# EAGLE board Mainland (EAGLE 9.2.0)
CNAME: MainlandBLE; CREVISION: RevB; DATECODE: Spooktober 2018
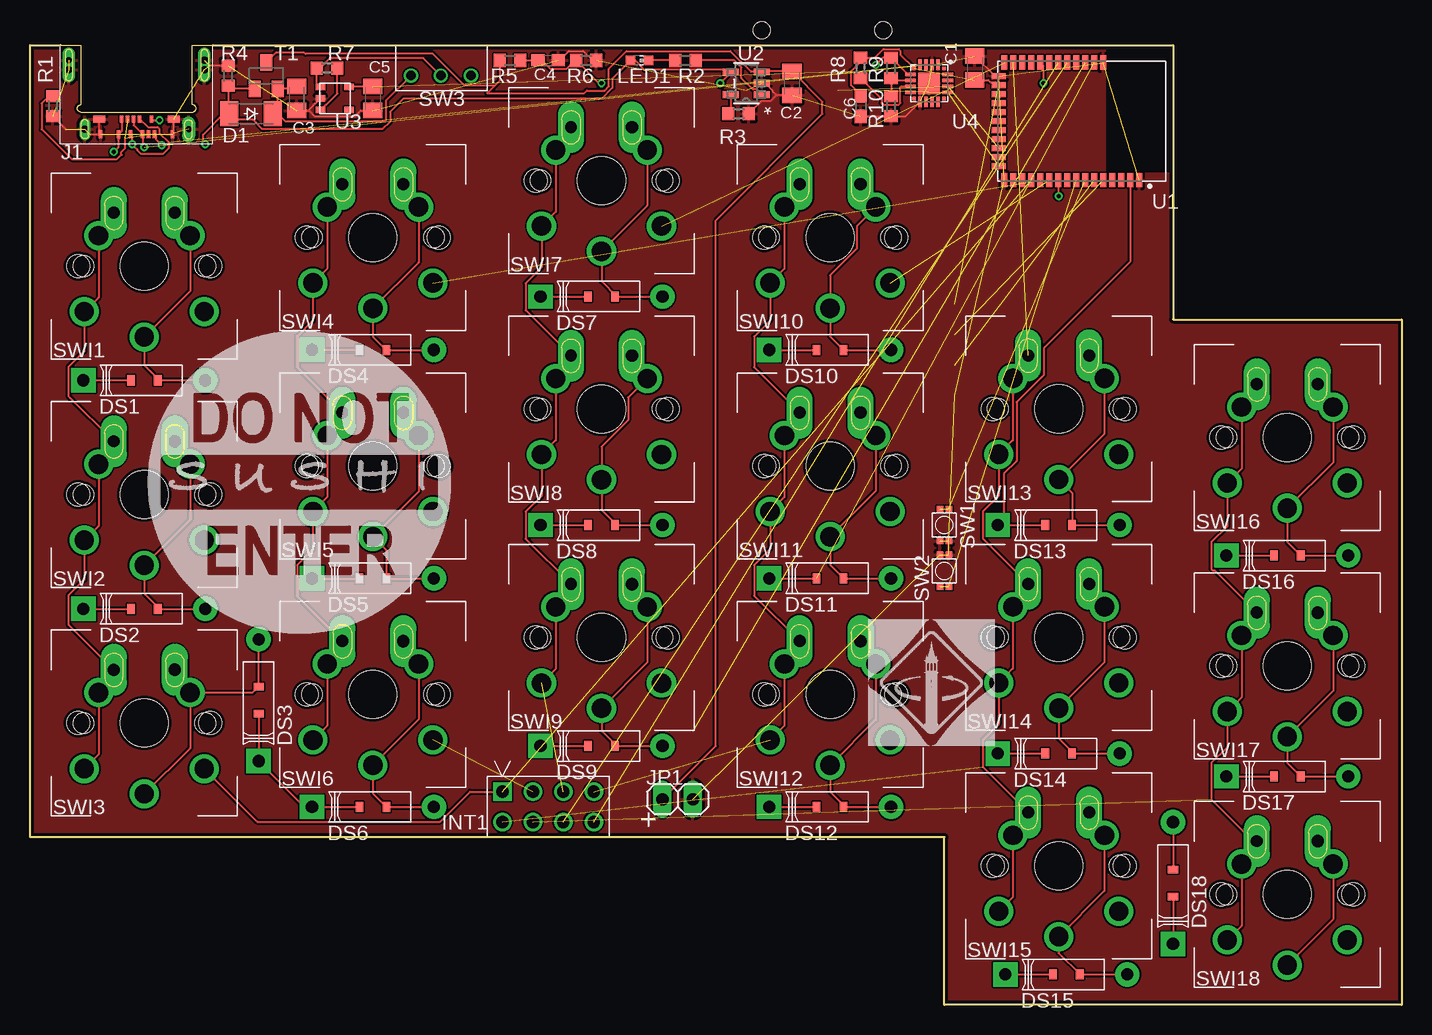
[diagram p0: board, top side]
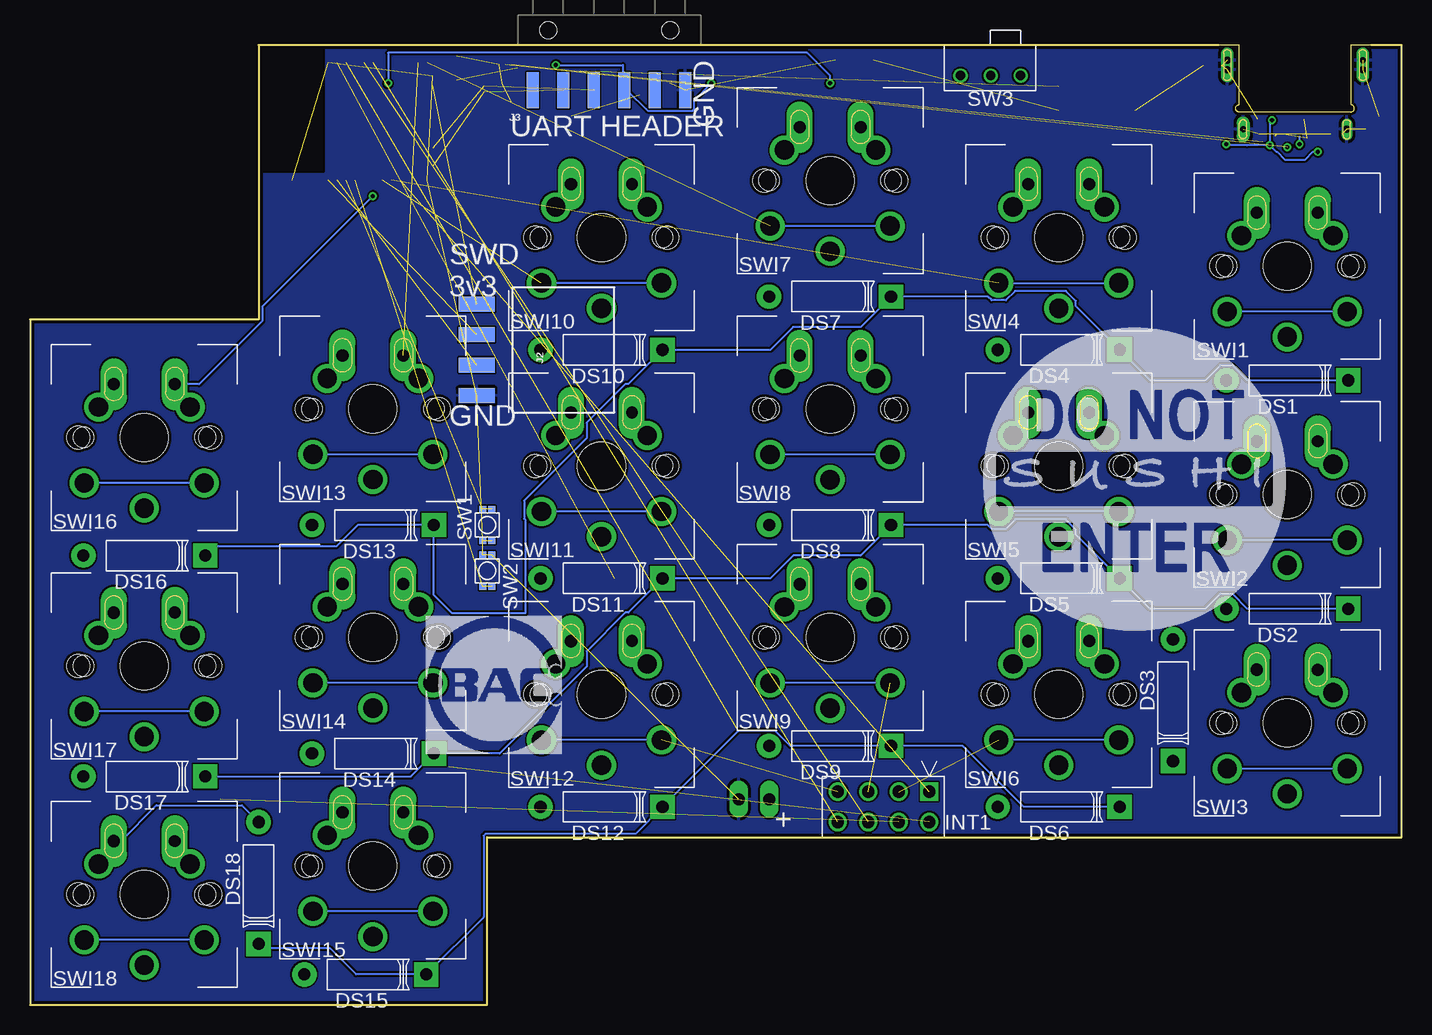
[diagram p1: board, bottom side, seen from below]

Size 114.3 x 80.01 mm. Coordinates in mm from the lower left corner, seen from the top.
Outline: 2.54,80.01 0,80.01 0,13.97 76.2,13.97 76.2,0 114.3,0 114.3,57.15 95.25,57.15 95.25,80.01 15.24,80.01
Copper layers (1*16): Top 0.035mm / dielectric 1.5mm / Bottom 0.035mm
Design rules "Sierra *": minimum track width 0.153mm, minimum drill 10mil, track to track 0.153mm, track to pad 0.153mm, pad to pad 0.153mm, via to via 0.153mm, smd to smd 0.153mm, copper to edge 10mil, drill to drill 10mil, minimum pad ring 6mil, minimum via ring 6mil, stop-mask expansion 4mil, vias tented up to drill 0mil, thermal gap 10mil
Net classes: 1 Power: width 0.254 mm
tKeepout: area 90.2,69.8 to 95.9,80.6
bKeepout: area 90.2,69.8 to 95.9,80.6
tRestrict: area 89.8,69.5 to 95.9,80.6
bRestrict: area 89.8,69.5 to 95.9,80.6

## Footprints (pad centres in the part's own frame; a part is rotated, then mirrored left to right if it is on the bottom)
C0805K = smd 1.3 x 1.6: 1 -1,0; 2 1,0
C0603 = smd 1.1 x 1: 1 -0.85,0; 2 0.85,0
SOD-123_MINI-SMA = smd 1.5 x 2.1: A 1.8,0; C -1.8,0
DIODE_COMBO = smd 0.635 x 0.838: ANOST 1.118,0; CATST -1.118,0 | drill 1.016 pad 2.032: ANOT 5.08,0 | drill 1.016 pad 2.032 square: CATT -5.08,0
INTRRIBBON = drill 1.016 square: C1 0,0 | drill 1.016: C2 2.54,0; C3 5.08,0; C4 7.62,0; C5 0,-2.54; C6 2.54,-2.54; T1 5.08,-2.54; T2 7.62,-2.54
WM17904_SIMP = smd 0.3 x 0.7: A1 -3,7.42; A4 -1.5,7.42; A5 -1,7.42; A6 -0.5,7.42; A7 0.5,7.42; A9 1.5,7.42; A12 3,7.42 | smd 1 x 0.6: B1 3.1,6.17; B12 -3.1,6.17 | smd 0.3 x 0.6: B4 1.25,6.17; B5 0.75,6.17; B6 0.25,6.17; B7 -0.25,6.17; B9 -1.25,6.17 | drill 0.6 pad 1.05 long: BLADELB -5.65,2.05; BLADELF -5.65,1.25; BLADERB 5.65,2.05 | drill 0.5 pad 1.05 long: BLADERF 5.65,1.25 | drill 0.5 pad 1.1 long: SHELLL -4.32,7.01 | drill 0.6 long: SHELLR 4.32,7.01
1X04_SMD_RA_FEMALE = smd 1.25 x 3: 1 -3.81,7.225; 2 -1.27,7.225; 3 1.27,7.225; 4 3.81,7.225
1X06-SMD_RA_MALE = smd 1 x 3: 1 -6.35,5; 2 -3.81,5; 3 -1.27,5; 4 1.27,5; 5 3.81,5; 6 6.35,5 | hole 1.4: -5.08,0; 5.08,0
1X02 = drill 1.016 long: 1 -1.27,0; 2 1.27,0
CHIP-LED0603 = smd 0.8 x 0.8: A 0,-0.75; C 0,0.75
R0603 = smd 1 x 1.1: 1 -0.85,0; 2 0.85,0
EVP-BBA = smd 0.55 x 0.55 bottom: A1 -1.325,0.375; A4 -1.325,-0.375; B3 1.325,0.375; B4 1.325,-0.375 | smd 0.55 x 0.55: A2 -1.325,-0.375; A3 -1.325,0.375; B1 1.325,0.375; B2 1.325,-0.375
MHSS1105 = drill 0.787: 1 0,0; 2 5.004,0; COMM 2.489,0
DOUBLED_SLOTS = drill 1.613: LCL -3.81,2.54; LLP -5,-3.8; LRLP 5,-3.8; RCL 3.81,2.54; RLMID 0,-5.9 | drill 0.991 pad 2.159 long: MML -2.54,4.445 | drill 1.016 pad 2.159 long: MMR 2.54,4.445 | hole 3.988: 0,0 | hole 1.702: -5.08,0; 5.08,0 | hole 1.9: -5.5,0; 5.5,0
SOT23-BEC = smd 1 x 1.4: B -0.95,-1.1; C 0,1.1; E 0.95,-1.1
XCVR_BL652-SA-01-T/R = smd 1.2 x 0.5: 1 4.9,4.8; 2 4.9,4.05; 3 4.9,3.3; 4 4.9,2.55; 5 4.9,1.8; 6 4.9,1.05; 7 4.9,0.3; 8 4.9,-0.45; 9 4.9,-1.2; 10 4.9,-1.95; 11 4.9,-2.7; 12 4.9,-3.45; 13 4.9,-4.2; 14 4.9,-4.95; 15 4.9,-5.7; 16 4.9,-6.45; 28 -4.9,-6.45; 29 -4.9,-5.7; 30 -4.9,-4.95; 31 -4.9,-4.2; 32 -4.9,-3.45; 33 -4.9,-2.7; 34 -4.9,-1.95; 35 -4.9,-1.2; 36 -4.9,-0.45; 37 -4.9,0.3; 38 -4.9,1.05; 39 -4.9,1.8 | smd 0.5 x 1.2: 17 3.75,-6.9; 18 3,-6.9; 19 2.25,-6.9; 20 1.5,-6.9; 21 0.75,-6.9; 22 0,-6.9; 23 -0.75,-6.9; 24 -1.5,-6.9; 25 -2.25,-6.9; 26 -3,-6.9; 27 -3.75,-6.9
SOT-23-5_MC = smd 1.321 x 0.559: 1 -1.295,0.95; 2 -1.295,0; 3 -1.295,-0.95; 4 1.295,-0.95; 5 1.295,0.95
TCR2EF = smd 0.8 x 0.55: CTRL -1.2,-0.95; GND -1.2,0; NC 1.2,-0.95; VIN -1.2,0.95; VOUT 1.2,0.95
SILABS_QFN20 = smd 0.3 x 0.3: 1 -1.25,1.25; 6 -1.25,-1.25; 11 1.25,-1.25; 16 1.25,1.25 | smd 0.9 x 0.3: 2 -1.55,0.75; 3 -1.55,0.25; 4 -1.55,-0.25; 5 -1.55,-0.75; 12 1.55,-0.75; 13 1.55,-0.25; 14 1.55,0.25; 15 1.55,0.75 | smd 0.3 x 0.9: 7 -0.75,-1.55; 8 -0.25,-1.55; 9 0.25,-1.55; 10 0.75,-1.55; 17 0.75,1.55; 18 0.25,1.55; 19 -0.25,1.55; 20 -0.75,1.55 | smd 1.8 x 1.8: 21 0,0

## Placement (x,y rotation side)
C1  10uF  [C0805K]  78.74,78.1 90 top
C2  10uF  [C0805K]  63.5,76.84 270 top
C3  10uF  [C0805K]  22.23,75.56 270 top
C4  .1pF  [C0603]  43.18,78.74 0 top
C5  10uF  [C0805K]  28.57,75.56 270 top
C6  .1uF  [C0603]  69.22,74.93 270 top
D1  CGRM4001-G  [SOD-123_MINI-SMA]  18.41,74.29 180 top
DS1  DIODECOMBO  [DIODE_COMBO]  9.52,52.07 0 top
DS2  DIODECOMBO  [DIODE_COMBO]  9.52,33.02 0 top
DS3  DIODECOMBO  [DIODE_COMBO]  19.05,25.4 90 top
DS4  DIODECOMBO  [DIODE_COMBO]  28.57,54.61 0 top
DS5  DIODECOMBO  [DIODE_COMBO]  28.57,35.56 0 top
DS6  DIODECOMBO  [DIODE_COMBO]  28.57,16.51 0 top
DS7  DIODECOMBO  [DIODE_COMBO]  47.63,59.05 0 top
DS8  DIODECOMBO  [DIODE_COMBO]  47.63,40.01 0 top
DS9  DIODECOMBO  [DIODE_COMBO]  47.63,21.59 0 top
DS10  DIODECOMBO  [DIODE_COMBO]  66.68,54.61 0 top
DS11  DIODECOMBO  [DIODE_COMBO]  66.68,35.56 0 top
DS12  DIODECOMBO  [DIODE_COMBO]  66.68,16.51 0 top
DS13  DIODECOMBO  [DIODE_COMBO]  85.72,40.01 0 top
DS14  DIODECOMBO  [DIODE_COMBO]  85.72,20.95 0 top
DS15  DIODECOMBO  [DIODE_COMBO]  86.36,2.54 0 top
DS16  DIODECOMBO  [DIODE_COMBO]  104.78,37.46 0 top
DS17  DIODECOMBO  [DIODE_COMBO]  104.78,19.05 0 top
DS18  DIODECOMBO  [DIODE_COMBO]  95.25,10.16 90 top
FRAME1  FRAME_LTR_CU_MARK  [FR-LTR-ON-PCB]  8.89,84.45 0 top  (outside the outline)
FRAME2  FRAME_LTR_CU_MARK  [FR-LTR-ON-PCB]  23.49,81.91 0 top
INT1  INTRCNNT4X2  [INTRRIBBON]  39.37,17.78 0 top
J1  USB-C2.0WM2.0  [WM17904_SIMP]  8.89,80.01 180 top
J2  RA 6Pin SMD  [1X04_SMD_RA_FEMALE]  69.85,54.61 90 bottom
J3  RA 6Pin SMD  [1X06-SMD_RA_MALE]  66.04,81.28 180 bottom
JP1  [1X02]  53.98,17.14 0 top
LED1  [CHIP-LED0603]  50.8,78.74 270 top
R1  5.1k  [R0603]  1.91,74.93 90 top
R2  1k  [R0603]  54.61,78.74 0 top
R3  10k  [R0603]  59.05,74.29 180 top
R4  100k  [R0603]  16.51,77.47 270 top
R5  806k  [R0603]  40.01,78.74 180 top
R6  2M  [R0603]  46.35,78.74 180 top
R7  100k  [R0603]  24.77,78.1 0 top
R8  1k  [R0603]  69.22,78.1 270 top
R9  22.1k  [R0603]  71.75,78.1 90 top
R10  47.5k  [R0603]  71.75,74.93 90 top
SW1  RSTSWSMALL_SMD  [EVP-BBA]  76.2,40.01 270 top
SW2  RSTSWSMALL_SMD  [EVP-BBA]  76.2,36.2 90 top
SW3  SLIDER_SWITCH  [MHSS1105]  31.75,77.47 0 top
SWI1  MX/ALPSDOUBLE_SLOT  [DOUBLED_SLOTS]  9.52,61.59 0 top
SWI2  MX/ALPSDOUBLE_SLOT  [DOUBLED_SLOTS]  9.52,42.54 0 top
SWI3  MX/ALPSDOUBLE_SLOT  [DOUBLED_SLOTS]  9.52,23.49 0 top
SWI4  MX/ALPSDOUBLE_SLOT  [DOUBLED_SLOTS]  28.57,63.98 0 top
SWI5  MX/ALPSDOUBLE_SLOT  [DOUBLED_SLOTS]  28.57,44.93 0 top
SWI6  MX/ALPSDOUBLE_SLOT  [DOUBLED_SLOTS]  28.57,25.88 0 top
SWI7  MX/ALPSDOUBLE_SLOT  [DOUBLED_SLOTS]  47.63,68.73 0 top
SWI8  MX/ALPSDOUBLE_SLOT  [DOUBLED_SLOTS]  47.63,49.68 0 top
SWI9  MX/ALPSDOUBLE_SLOT  [DOUBLED_SLOTS]  47.63,30.63 0 top
SWI10  MX/ALPSDOUBLE_SLOT  [DOUBLED_SLOTS]  66.68,63.98 0 top
SWI11  MX/ALPSDOUBLE_SLOT  [DOUBLED_SLOTS]  66.68,44.93 0 top
SWI12  MX/ALPSDOUBLE_SLOT  [DOUBLED_SLOTS]  66.68,25.88 0 top
SWI13  MX/ALPSDOUBLE_SLOT  [DOUBLED_SLOTS]  85.72,49.7 0 top
SWI14  MX/ALPSDOUBLE_SLOT  [DOUBLED_SLOTS]  85.72,30.65 0 top
SWI15  MX/ALPSDOUBLE_SLOT  [DOUBLED_SLOTS]  85.72,11.6 0 top
SWI16  MX/ALPSDOUBLE_SLOT  [DOUBLED_SLOTS]  104.78,47.31 0 top
SWI17  MX/ALPSDOUBLE_SLOT  [DOUBLED_SLOTS]  104.78,28.26 0 top
SWI18  MX/ALPSDOUBLE_SLOT  [DOUBLED_SLOTS]  104.78,9.21 0 top
T1  [SOT23-BEC]  19.69,77.47 0 top
U1  BL652-SA-01-T/R  [XCVR_BL652-SA-01-T/R]  87.63,73.66 270 top
U2  MCP73831T-2ACI/OT  [SOT-23-5_MC]  59.69,76.84 180 top
U3  [TCR2EF]  25.4,75.56 0 top
U4  CP2102N-A01-GQFN20  [SILABS_QFN20]  74.93,76.84 270 top
U$1  [1INCH_TOP]  9.78,30.86 0 top
U$2  [BAC_SELLOUT]  81.28,20.95 0 bottom
U$3  [1INCH_TOP]  34.93,31.12 0 bottom
U$4  [IEEE_BERKELEY]  69.85,21.59 0 top

## Library data of the parts
C1-C6 R1-R10 = resistor
D1 = diode
DS1-DS18 INT1 J1 SW1-SW3 SWI1-SWI18 U3 = Keys
FRAME1 FRAME2 = ProperFrame
J2 = SparkFun-Connectors; PROD_ID: CONN-12382
J3 = SparkFun-Connectors; PROD_ID: CONN-08971
JP1 = pinhead
LED1 = led
T1 = transistor
U1 = BL652-SA-01-T_R; DESCRIPTION: Bluetooth 1.8V to 3.6V 1Mbps 39-Pin SMD Module T/R; DIGI-KEY_PART_NUMBER: BL652-SA-01-CT-ND; DIGI-KEY_PURCHASE_URL: https://www.digikey.com/product-detail/en/laird-wireless-thermal-systems/BL652-SA-01-T-R/BL652-SA-01-CT-ND/6181738?utm_source=snapeda&utm_medium=aggregator&utm_campaign=symbol; MF: Laird -; MP: BL652-SA-01-T/R; PACKAGE: SMD-39 Laird
U2 = MCP73831; MANUFACTURER_PART_NUMBER: MCP73831T2ACIOT; VENDOR: Microchip
U4 = CP2102N-A01-GQFN20; DESCRIPTION: Usb-Uart Interface Bridge, Qfn-20; DIGI-KEY_PART_NUMBER: 336-3692-ND; DIGI-KEY_PURCHASE_URL: https://www.digikey.com/product-detail/en/silicon-labs/CP2102N-A01-GQFN20/336-3692-ND/6012517?utm_source=snapeda&utm_medium=aggregator&utm_campaign=symbol; MF: Silicon Labs; MP: CP2102N-A01-GQFN20; PACKAGE: QFN-20 Silicon Labs
U$1-U$4 = Logos

## Nets
3.3V: C1.1 C5.1 C6.1 J2.4 R8.1 U1.26 U3.VOUT U4.6
BATT_M: C4.1 R5.1 R6.2 U1.32
COL1: INT1.C1 SWI1.LCL SWI1.LLP SWI1.LRLP SWI1.MML SWI2.LCL SWI2.LLP SWI2.LRLP SWI2.MML SWI3.LCL SWI3.LLP SWI3.LRLP SWI3.MML U1.13
COL2: INT1.C2 SWI4.LCL SWI4.LLP SWI4.LRLP SWI4.MML SWI5.LCL SWI5.LLP SWI5.LRLP SWI5.MML SWI6.LCL SWI6.LLP SWI6.LRLP SWI6.MML U1.12
COL3: INT1.C3 SWI7.LCL SWI7.LLP SWI7.LRLP SWI7.MML SWI8.LCL SWI8.LLP SWI8.LRLP SWI8.MML SWI9.LCL SWI9.LLP SWI9.LRLP SWI9.MML U1.28
COL4: INT1.C4 SWI10.LCL SWI10.LLP SWI10.LRLP SWI10.MML SWI11.LCL SWI11.LLP SWI11.LRLP SWI11.MML SWI12.LCL SWI12.LLP SWI12.LRLP SWI12.MML U1.11
COL5: INT1.C5 SWI13.LCL SWI13.LLP SWI13.LRLP SWI13.MML SWI14.LCL SWI14.LLP SWI14.LRLP SWI14.MML SWI15.LCL SWI15.LLP SWI15.LRLP SWI15.MML U1.29
COL6: INT1.C6 SWI16.LCL SWI16.LLP SWI16.LRLP SWI16.MML SWI17.LCL SWI17.LLP SWI17.LRLP SWI17.MML SWI18.LCL SWI18.LLP SWI18.LRLP SWI18.MML U1.10
DFU: SW2.A1 SW2.A2 U1.8
DMINUS: J1.A7 J1.B7 U4.5
DPLUS: J1.A6 J1.B6 U4.4
GND: C1.2 C2.2 C3.2 C4.2 C5.2 C6.2 J1.A1 J1.A12 J1.B1 J1.B12 J1.BLADELB J1.BLADELF J1.BLADERB J1.BLADERF J1.SHELLL J1.SHELLR J2.1 J3.1 JP1.2 R1.1 R3.1 R4.1 R6.1 R10.1 SW1.B1 SW1.B2 SW2.B1 SW2.B2 U1.1 U1.16 U1.27 U1.39 U2.2 U3.GND U4.3 U4.12 U4.21
N$1: DS1.ANOST DS1.ANOT SWI1.MMR SWI1.RCL SWI1.RLMID
N$2: DS4.ANOST DS4.ANOT SWI4.MMR SWI4.RCL SWI4.RLMID
N$3: DS7.ANOST DS7.ANOT SWI7.MMR SWI7.RCL SWI7.RLMID
N$4: DS10.ANOST DS10.ANOT SWI10.MMR SWI10.RCL SWI10.RLMID
N$5: DS13.ANOST DS13.ANOT SWI13.MMR SWI13.RCL SWI13.RLMID
N$6: DS16.ANOST DS16.ANOT SWI16.MMR SWI16.RCL SWI16.RLMID
N$7: DS2.ANOST DS2.ANOT SWI2.MMR SWI2.RCL SWI2.RLMID
N$8: DS5.ANOST DS5.ANOT SWI5.MMR SWI5.RCL SWI5.RLMID
N$9: DS8.ANOST DS8.ANOT SWI8.MMR SWI8.RCL SWI8.RLMID
N$10: DS11.ANOST DS11.ANOT SWI11.MMR SWI11.RCL SWI11.RLMID
N$11: DS14.ANOST DS14.ANOT SWI14.MMR SWI14.RCL SWI14.RLMID
N$12: DS17.ANOST DS17.ANOT SWI17.MMR SWI17.RCL SWI17.RLMID
N$13: DS3.ANOST DS3.ANOT SWI3.MMR SWI3.RCL SWI3.RLMID
N$14: DS6.ANOST DS6.ANOT SWI6.MMR SWI6.RCL SWI6.RLMID
N$15: DS9.ANOST DS9.ANOT SWI9.MMR SWI9.RCL SWI9.RLMID
N$16: DS12.ANOST DS12.ANOT SWI12.MMR SWI12.RCL SWI12.RLMID
N$17: DS15.ANOST DS15.ANOT SWI15.MMR SWI15.RCL SWI15.RLMID
N$18: DS18.ANOST DS18.ANOT SWI18.MMR SWI18.RCL SWI18.RLMID
N$19: R7.2 U3.CTRL
N$20: J1.A5 J1.B5 R1.2
N$21: R7.1 SW3.COMM U3.VIN
N$22: LED1.C R2.1
N$23: R2.2 U2.1
N$24: R3.2 U2.5
N$25: R9.1 R10.2 U4.8
N$26: R8.2 U4.9
N$27: C3.1 D1.C SW3.1 T1.E
RESET: SW1.A1 SW1.A2 U1.7
ROW1: DS1.CATST DS1.CATT DS4.CATST DS4.CATT DS7.CATST DS7.CATT DS10.CATST DS10.CATT DS13.CATST DS13.CATT DS16.CATST DS16.CATT U1.2
ROW2: DS2.CATST DS2.CATT DS5.CATST DS5.CATT DS8.CATST DS8.CATT DS11.CATST DS11.CATT DS14.CATST DS14.CATT DS17.CATST DS17.CATT U1.38
ROW3: DS3.CATST DS3.CATT DS6.CATST DS6.CATT DS9.CATST DS9.CATT DS12.CATST DS12.CATT DS15.CATST DS15.CATT DS18.CATST DS18.CATT U1.37
ROW4: U1.36
ROW5T1: INT1.T1 U1.35
ROW6T2: INT1.T2 U1.34
RX0: J3.5 U1.17 U4.17
SWDCLK: J2.2 U1.6
SWDIO: J2.3 U1.5
TX0: J3.4 U1.19 U4.18
V_BATT: C2.1 JP1.1 R5.2 T1.C U2.3
V_USB: D1.A J1.A4 J1.A9 J1.B4 J1.B9 J3.3 LED1.A R4.2 R9.2 T1.B U2.4 U4.7

## Tracks (layer width: path | path; a pad name or v marks a point on that pad's centre or on a via)
3.3V  (3 unrouted)
  Top 0.178: U1.26 80.46,76.93 80.03,76.93 79.86,77.1 C1.1 | C6.1 69.22,75.88 68.44,76.66 68.44,77.85 69.22,78.63 R8.1 70.38,78.95 71.11,79.68 72.4,79.68 72.53,79.55 72.53,79.23 U4.6 | C5.1 26.65,76.56 U3.VOUT
BATT_M  (via drill 0.35)
  Top 0.152: 84.46,77.86 84.45,77.87
  Top 0.178: R5.1 C4.1 42.66,78.74 43.38,78.01 44.68,78.01 45.24,78.58 45.35,78.58 R6.2 47.41,76.84 v47.63,76.84 | 84.46,77.86 v84.46,76.84 | 84.45,77.87 84.45,78.29 U1.32
  Bottom 0.178: v47.63,76.84 47.63,77.47 49.53,79.38 84.46,79.38 v84.46,76.84
COL1  (1 unrouted)
  Top 0.178: SWI1.MML 6.98,65.41 SWI1.LCL 5.72,58.98 SWI1.LLP 4.52,54.51 3.2,53.18 3.2,50.77 SWI2.MML 6.98,46.35 SWI2.LCL 5.72,39.93 SWI2.LLP 4.52,35.45 3.2,34.13 3.2,31.73 SWI3.MML 6.98,27.3 SWI3.LCL 5.72,20.88 SWI3.LLP | INT1.C1 36.68,17.78 34.17,15.27 18.95,15.27 SWI3.LRLP
  Bottom 0.178: SWI1.LLP SWI1.LRLP | SWI2.LLP SWI2.LRLP | SWI3.LLP SWI3.LRLP
COL2  (2 unrouted)
  Top 0.178: SWI4.MML 26.04,67.79 SWI4.LCL 24.77,61.37 SWI4.LLP 23.57,57.04 22.25,55.72 22.25,53.16 SWI5.MML 26.04,48.74 SWI5.LCL 24.77,42.32 SWI5.LLP 23.57,37.99 22.25,36.67 22.25,34.11 SWI6.MML 24.77,29.06 SWI6.LCL 24.77,23.27 SWI6.LLP
  Bottom 0.178: SWI5.LLP SWI5.LRLP | SWI6.LLP SWI6.LRLP | SWI4.LRLP SWI4.LLP
COL3  (2 unrouted)
  Top 0.178: SWI7.MML 45.09,72.54 SWI7.LCL 43.82,66.12 SWI7.LLP 42.63,61.49 41.3,60.17 41.3,57.91 SWI8.MML 45.09,53.49 SWI8.LCL 43.82,47.07 SWI8.LLP 42.63,42.44 41.3,41.12 41.3,38.86 SWI9.MML 45.09,34.44 SWI9.LCL 43.82,28.02 SWI9.LLP
  Bottom 0.178: SWI8.LLP SWI8.LRLP | SWI9.LLP SWI9.LRLP | SWI7.LLP SWI7.LRLP
COL4  (2 unrouted)
  Top 0.178: SWI10.MML 64.13,67.79 SWI10.LCL 62.87,61.37 SWI10.LLP 61.68,57.04 60.35,55.72 60.35,53.16 SWI11.MML 64.13,48.74 SWI11.LCL 62.87,42.32 SWI11.LLP 61.68,37.99 60.35,36.67 60.35,34.11 SWI12.MML 64.13,29.69 SWI12.LCL 62.87,23.27 SWI12.LLP
  Bottom 0.178: SWI10.LLP SWI10.LRLP | SWI11.LLP SWI11.LRLP | SWI12.LLP SWI12.LRLP
COL5  (2 unrouted)
  Top 0.178: SWI13.MML 83.19,53.51 SWI13.LCL 81.91,47.09 SWI13.LLP 80.72,42.44 79.4,41.12 79.4,38.87 SWI14.MML 81.91,33.82 SWI14.LCL 81.91,28.04 SWI14.LLP 80.72,23.39 79.4,22.07 79.4,19.82 SWI15.MML 83.19,15.4 SWI15.LCL 81.91,8.98 SWI15.LLP
  Bottom 0.178: SWI13.LLP SWI13.LRLP | SWI14.LLP SWI14.LRLP | SWI15.LLP SWI15.LRLP
COL6  (via drill 0.35)  (1 unrouted)
  Top 0.178: SWI16.MML 102.23,51.12 SWI16.LCL 100.97,44.7 SWI16.LLP 99.78,39.9 98.45,38.58 98.45,36.35 98.58,36.22 98.72,36.22 SWI17.MML 102.23,32.07 SWI17.LCL 100.97,25.65 SWI17.LLP 99.78,21.48 98.45,20.16 98.45,17.12 102.23,13.34 | 102.49,13.08 102.23,13.34 | 102.23,13.34 SWI18.MML 100.97,12.38 SWI18.LCL 100.97,6.6 SWI18.LLP | U1.10 85.68,67.48 v85.72,67.44
  Bottom 0.178: SWI18.LLP SWI18.LRLP | SWI17.LLP SWI17.LRLP | SWI16.LLP SWI16.LRLP | v85.72,67.44 94.94,58.22 94.94,57.02 100.22,51.75 SWI16.MML
DFU  (2 unrouted)
DMINUS  (via drill 0.35)  (1 unrouted)
  Top 0.178: J1.A7 8.51,72.47 v8.51,71.75 8.96,71.31 8.96,71.26 9.29,70.93 11.05,70.93 11.55,71.44 11.55,71.91 10.78,72.68 10.78,73.04 10.64,73.18 9.85,73.18 J1.B7
  Bottom 0.178: 8.51,72.42 v8.51,71.75
DPLUS  (via drill 0.35)  (1 unrouted)
  Top 0.178: J1.B6 8.64,73.34 J1.A6 9.39,71.64 v9.52,71.5
GND  (26 unrouted)
  Top 0.152: 23.2,74.56 C3.2
  Top 0.178: 2.98,73 R1.1 | U4.12 72.97,74.08 R10.1 C6.2 | C1.2 80.44,77.41 U1.27 | R3.1 60.99,75.38 61.74,75.38 62.2,75.84 62.23,75.84 | C2.2 62.23,75.84 | 62.23,75.84 61.87,76.19 61.87,76.26 61.3,76.84 U2.2 | C4.2 44.13,78.74 44.91,79.52 46.1,79.52 46.88,78.74 R6.1 | U3.GND 23.75,75.12 23.71,75.12 23.57,74.98 23.57,74.94 23.2,74.56 | C3.2 23.25,74.56 23.71,74.11 27.1,74.11 27.55,74.56 C5.2 | R4.1 14.98,78.32 | J1.A1 11.99,72.69 J1.B12 | J1.B1 5.79,72.69 J1.A12 4.98,72.59
  pour Bottom: 0,80.01 4.45,80.01 4.45,74.68 13.34,74.68 13.34,80.01 95.25,80.01 95.25,57.15 114.3,57.15 114.3,0 76.2,0 76.2,13.97 0,13.97
  pour Top: 0,80.01 4.45,80.01 4.45,74.68 13.34,74.68 13.34,80.01 95.25,80.01 95.25,57.15 114.3,57.15 114.3,0 76.2,0 76.2,13.97 0,13.97
N$1
  Top 0.178: DS1.ANOT 10.8,52.07 | 10.8,52.07 DS1.ANOST | SWI1.MMR 12.07,65.41 SWI1.RCL 13.34,59.51 SWI1.RLMID 9.52,53.34 10.8,52.07
N$2
  Top 0.178: DS4.ANOT DS4.ANOST 28.57,55.73 SWI4.RLMID 32.38,61.89 SWI4.RCL 32.38,67.16 SWI4.MMR
N$3
  Top 0.178: DS7.ANOST 48.9,59.05 | 48.9,59.05 DS7.ANOT | SWI7.MMR 51.43,71.91 SWI7.RCL 51.43,66.64 SWI7.RLMID 47.63,60.32 48.9,59.05
N$4
  Top 0.178: DS10.ANOT DS10.ANOST 66.68,55.73 SWI10.RLMID 66.68,60.84 68.9,63.06 68.9,64.94 SWI10.RCL 69.22,67.79 SWI10.MMR
N$5
  Top 0.178: SWI13.MMR 88.26,53.51 SWI13.RCL 89.53,47.6 SWI13.RLMID 86.84,42.68 DS13.ANOST DS13.ANOT
N$6
  Top 0.178: SWI16.MMR 107.31,51.12 SWI16.RCL 108.59,45.22 SWI16.RLMID 104.78,38.58 DS16.ANOST DS16.ANOT
N$7
  Top 0.178: DS2.ANOST 10.8,33.02 | 10.8,33.02 DS2.ANOT | SWI2.MMR 12.07,46.35 SWI2.RCL 13.34,40.45 SWI2.RLMID 9.52,34.29 10.8,33.02
N$8
  Top 0.178: DS5.ANOT DS5.ANOST 29.69,37.91 SWI5.RLMID 28.57,38.99 | SWI5.MMR 31.12,48.74 SWI5.RCL 32.38,42.8 28.57,38.99 | 28.07,38.48 28.57,38.99
N$9
  Top 0.178: SWI8.MMR 51.43,52.86 SWI8.RCL 49.85,50.63 49.85,48.76 47.63,46.54 SWI8.RLMID 47.63,41.27 48.9,40.01 | DS8.ANOST 48.9,40.01 | 48.9,40.01 DS8.ANOT
N$10
  Top 0.178: DS11.ANOT DS11.ANOST 66.68,36.68 SWI11.RLMID 70.49,42.84 SWI11.RCL 69.22,48.74 SWI11.MMR
N$11
  Top 0.178: DS14.ANOST 87,20.95 | 87,20.95 DS14.ANOT | SWI14.MMR 89.53,33.82 SWI14.RCL 89.53,28.55 SWI14.RLMID 85.72,22.22 87,20.95
N$12
  Top 0.178: DS17.ANOT DS17.ANOST 104.78,20.17 SWI17.RLMID 108.59,26.17 SWI17.RCL 108.59,31.43 SWI17.MMR
N$13
  Top 0.152: DS3.ANOST 19.05,26.54
  Top 0.178: SWI3.MMR 12.07,27.3 SWI3.RCL | SWI3.RCL 13.34,21.4 SWI3.RLMID | DS3.ANOT 19.05,26.54 18.54,26.04 SWI3.RCL
N$14
  Top 0.178: DS6.ANOT DS6.ANOST 28.57,17.63 SWI6.RLMID 32.38,23.79 SWI6.RCL 32.38,29.06 SWI6.MMR
N$15
  Top 0.178: DS9.ANOST 48.9,21.59 | 48.9,21.59 DS9.ANOT | SWI9.MMR 51.43,33.81 SWI9.RCL 51.43,28.54 SWI9.RLMID 47.63,22.86 48.9,21.59
N$16
  Top 0.178: DS12.ANOST 67.94,16.51 | 67.94,16.51 DS12.ANOT | SWI12.MMR 69.22,29.69 SWI12.RCL 70.49,23.79 SWI12.RLMID 66.68,17.78 67.94,16.51
N$17
  Top 0.178: DS15.ANOST 87.5,2.54 | 87.5,2.54 DS15.ANOT | SWI15.MMR 88.26,15.4 SWI15.RCL 89.53,9.5 SWI15.RLMID 85.72,4.32 87.5,2.54
N$18
  Top 0.178: SWI18.MMR 107.31,13.02 SWI18.RCL 108.59,7.12 SWI18.RLMID | DS18.ANOT DS18.ANOST
  Bottom 0.178: SWI18.MMR 106.74,13.65 103.76,16.64 96.65,16.64 DS18.ANOT
N$19
  Top 0.178: U3.CTRL 24.65,75.06 24.7,75.06 25.62,75.98 R7.2
N$20  (2 unrouted)
  Top 0.178: R1.2 1.6,75.78 0.97,75.16 0.97,73 3.46,70.51 7.24,70.51 7.59,70.87 | 7.59,70.87 7.59,71.09 7.9,71.4 7.9,72.26 | 7.59,70.87 7.65,70.87
N$21
  Top 0.178: U3.VIN 23.91,76.8 R7.1 24.17,78.1 25,78.93 32.77,78.93 SW3.COMM
N$22
  Top 0.178: R2.1 LED1.C
N$23
  Top 0.178: U2.1 60.54,76.33 60.23,76.33 59.28,77.27 59.28,78.16 58.7,78.74 R2.2
N$24
  Top 0.178: U2.5 58.4,74.48 R3.2
N$25
  Top 0.178: U4.8 71.93,77.09 R9.1 R10.2
N$26
  Top 0.178: U4.9 72.59,76.59 72.53,76.53 72.53,75.19 72.4,75.05 71.11,75.05 70.98,75.19 70.98,75.49 R8.2
N$27
  Top 0.178: C3.1 22.03,76.37 T1.E 20.63,74.72 D1.C 20.65,74.29 21.31,73.64 29.49,73.64 29.65,73.8 29.65,75.37 SW3.1
RESET  (2 unrouted)
ROW1
  Top 0.178: DS1.CATST DS1.CATT | DS4.CATT DS4.CATST | DS7.CATT DS7.CATST | DS10.CATT DS10.CATST | DS13.CATT 81.15,40.01 | 81.15,40.01 DS13.CATST | DS16.CATT DS16.CATST | U1.2 91.68,61.96 84.49,54.77 84.49,52.52 82.22,50.24 82.22,45.36 81.15,44.29 81.15,40.01
  Bottom 0.178: DS1.CATT 12.84,52.07 14.09,53.31 15.12,53.31 16.37,52.07 20.95,52.07 DS4.CATT 27.14,58.25 27.14,58.68 27.98,59.52 32.2,59.52 32.98,58.74 34.17,58.74 34.48,59.05 DS7.CATT 45.09,56.51 50.71,56.51 52.61,54.61 DS10.CATT 64.44,51.76 64.68,51.76 67.91,48.54 67.91,47.25 73.11,42.05 73.11,40.54 73.03,40.45 73.03,32.64 79.12,32.64 80.65,34.16 DS13.CATT 87,40.01 88.77,38.23 98.93,38.23 DS16.CATT
ROW2  (1 unrouted)
  Top 0.178: DS2.CATT DS2.CATST | DS5.CATT DS5.CATST | DS8.CATT DS8.CATST | DS11.CATT DS11.CATST | DS14.CATT DS14.CATST | DS17.CATT DS17.CATST
  Bottom 0.178: DS2.CATT 12.84,33.02 14.09,34.26 15.12,34.26 16.37,33.02 20.95,33.02 DS5.CATT 27.14,39.2 27.14,39.63 27.98,40.47 32.2,40.47 32.98,39.69 34.17,39.69 34.48,40.01 DS8.CATT 45.09,37.46 50.71,37.46 52.61,35.56 DS11.CATT 64.44,32.71 64.68,32.71 67.91,29.48 67.91,28.2 75.16,20.95 DS14.CATT 82.55,19.05 DS17.CATT
ROW3  (1 unrouted)
  Top 0.178: DS6.CATST DS6.CATT 22.86,16.51 DS3.CATT DS3.CATST | DS9.CATT DS9.CATST | DS12.CATT DS12.CATST | DS15.CATT DS15.CATST | DS18.CATST DS18.CATT 95.63,4.7
  Bottom 0.178: DS6.CATT 31.5,16.51 36.58,21.59 DS9.CATT 50.95,21.59 52.19,22.84 55.27,22.84 DS12.CATT 63.83,14.27 76.33,14.27 76.5,14.1 76.5,7.31 DS15.CATT 87.12,2.54 89.28,4.7 94.87,4.7 DS18.CATT
ROW5T1  (1 unrouted)
ROW6T2  (1 unrouted)
RX0  (2 unrouted)
SWDCLK  (1 unrouted)
SWDIO  (1 unrouted)
TX0  (2 unrouted)
V_BATT
  Top 0.178: JP1.1 57.15,21.59 57.15,65.41 66.04,74.29 66.04,75.29 C2.1 61.6,77.84 61.04,77.84 U2.3 60.09,77.78 58.35,79.52 49.71,79.52 48.23,78.04 48.23,76.58 47.88,76.23 46.41,76.23 46.2,76.02 38.1,76.02 38.74,76.65 | 38.74,76.65 36.22,76.65 33.58,79.29 22.95,79.29 22.86,79.38 20.49,79.38 T1.C | R5.2 39.16,77.07 38.74,76.65
V_USB  (via drill 0.35)  (1 unrouted)
  Top 0.178: T1.B 16.76,76.37 R4.2 16.51,74.4 D1.A | U4.7 73.12,77.59 R9.2 71.08,78.95 v70.49,78.36 | 58.31,77.87 U2.4 58.31,77.7 | 58.31,77.87 58.22,77.96 51.21,77.96 50.43,78.74 LED1.A 48.54,77.23 48.54,76.46 47.64,75.56 31.12,75.56 30.01,74.46 30.01,73.65 29.37,73.02 19.37,73.02 18.6,73.79 16.89,73.79 16.89,74.02 D1.A | J1.B4 7.64,72.84 J1.A9 7.39,72.18 7.34,72.13 7.34,71.48 v6.98,71.12 | 10.51,72.47 10.51,72.15 v10.98,71.67 | D1.A 16.16,74.29 14.43,72.57 14.43,71.93 v14.61,71.75 | v57.53,76.84 58.31,77.62 58.31,77.7 | 58.31,77.7 58.31,77.87 | J1.B9 10.28,73.75 v10.8,73.75
  Bottom 0.178: v10.98,71.67 10.43,71.12 10.38,71.12 9.75,70.49 8.03,70.49 7.4,71.12 v6.98,71.12 | v70.49,78.36 64.9,78.36 64.9,77.85 64.77,77.72 J3.3 64.55,76.28 62.82,74.55 59.1,74.55 58.96,74.69 58.96,75.41 v57.53,76.84 | v10.8,73.75 10.98,73.56 v10.98,71.67 | v10.98,71.67 12.87,71.67 12.88,71.66 14.51,71.66 v14.61,71.75

## Text on the board
tPlace: +
bPlace: GND | UART HEADER | SWD / 3v3 | GND | +